# Altium PCB BattBastion_2layer.PcbDoc (part 1 of 2)
Units mm, origin at the board's own origin, x right, y up, seen from the top; angles counter-clockwise.
Board outline 51.31 x 36.45 mm, 2 copper layers (Top Layer, Bottom Layer); 74 components, 42 nets, 277 pads, 438 vias.
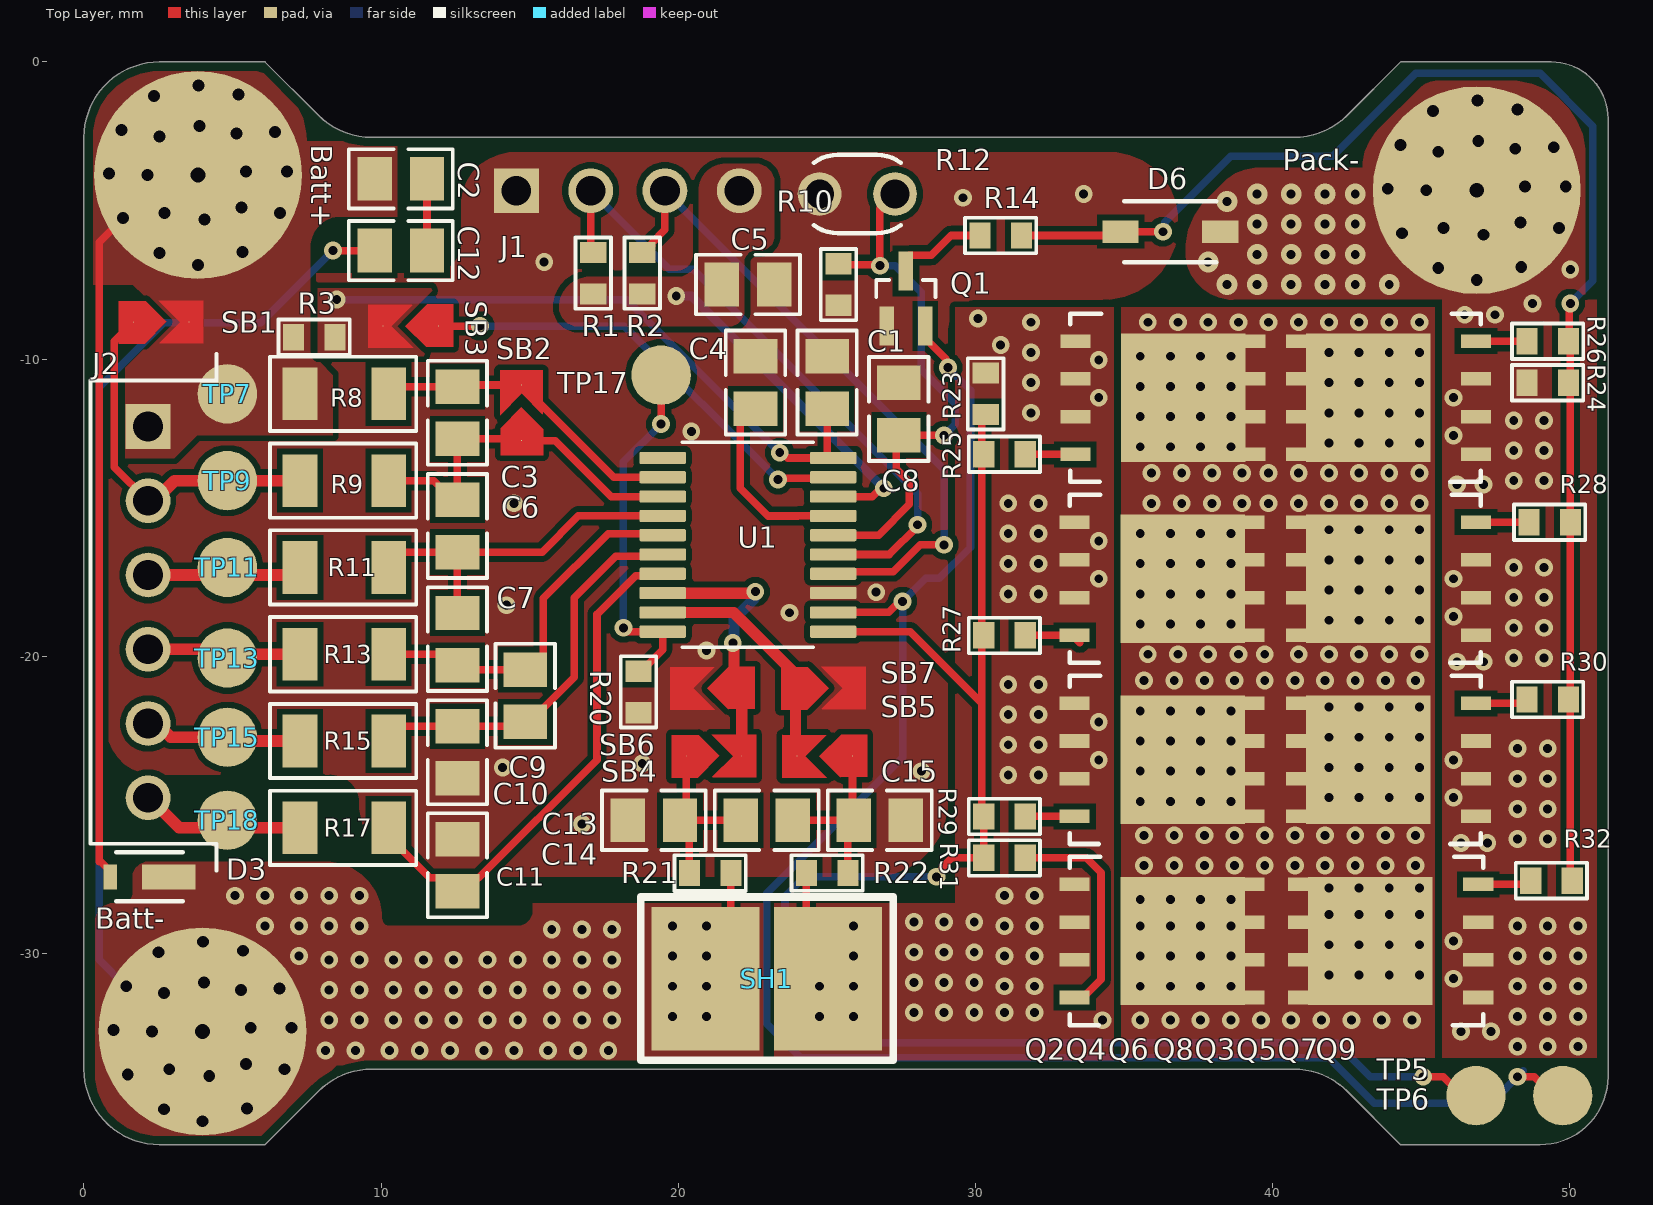
[diagram p0: Top Layer view]
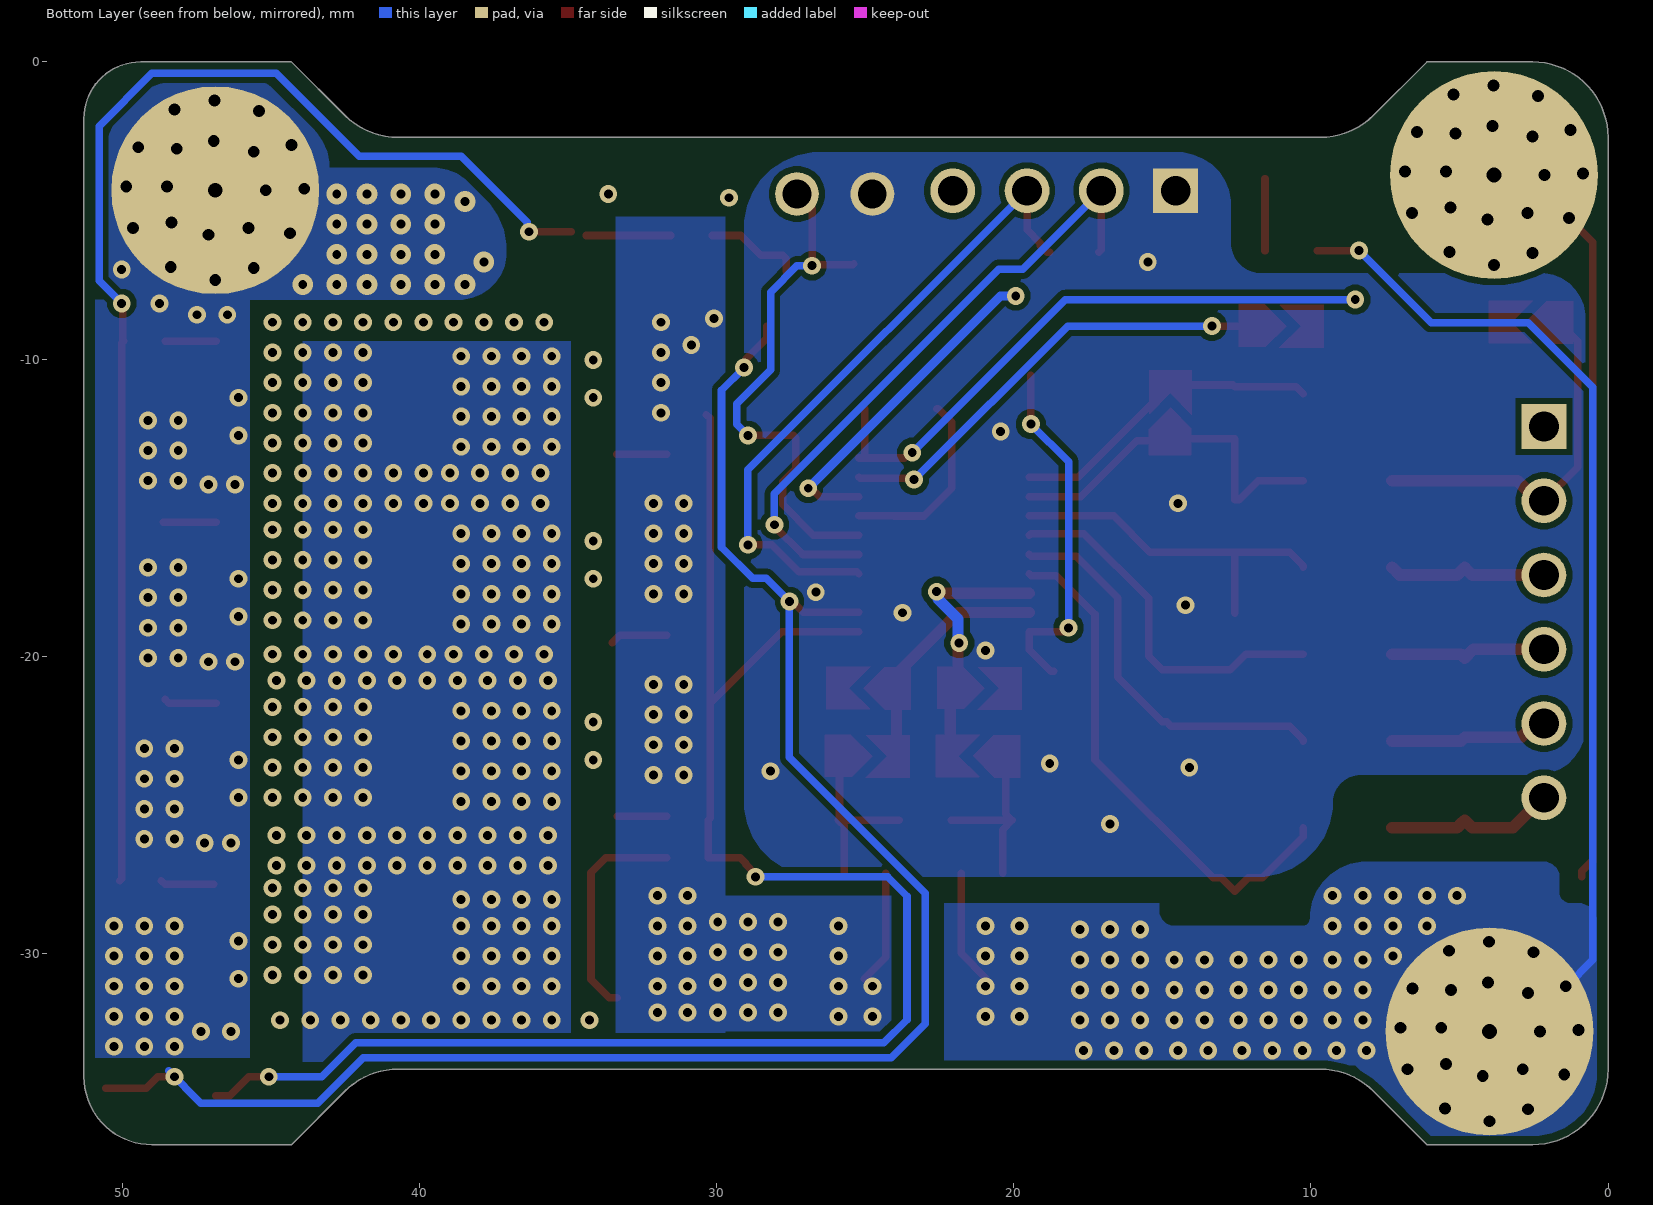
[diagram p1: Bottom Layer view, seen from below]
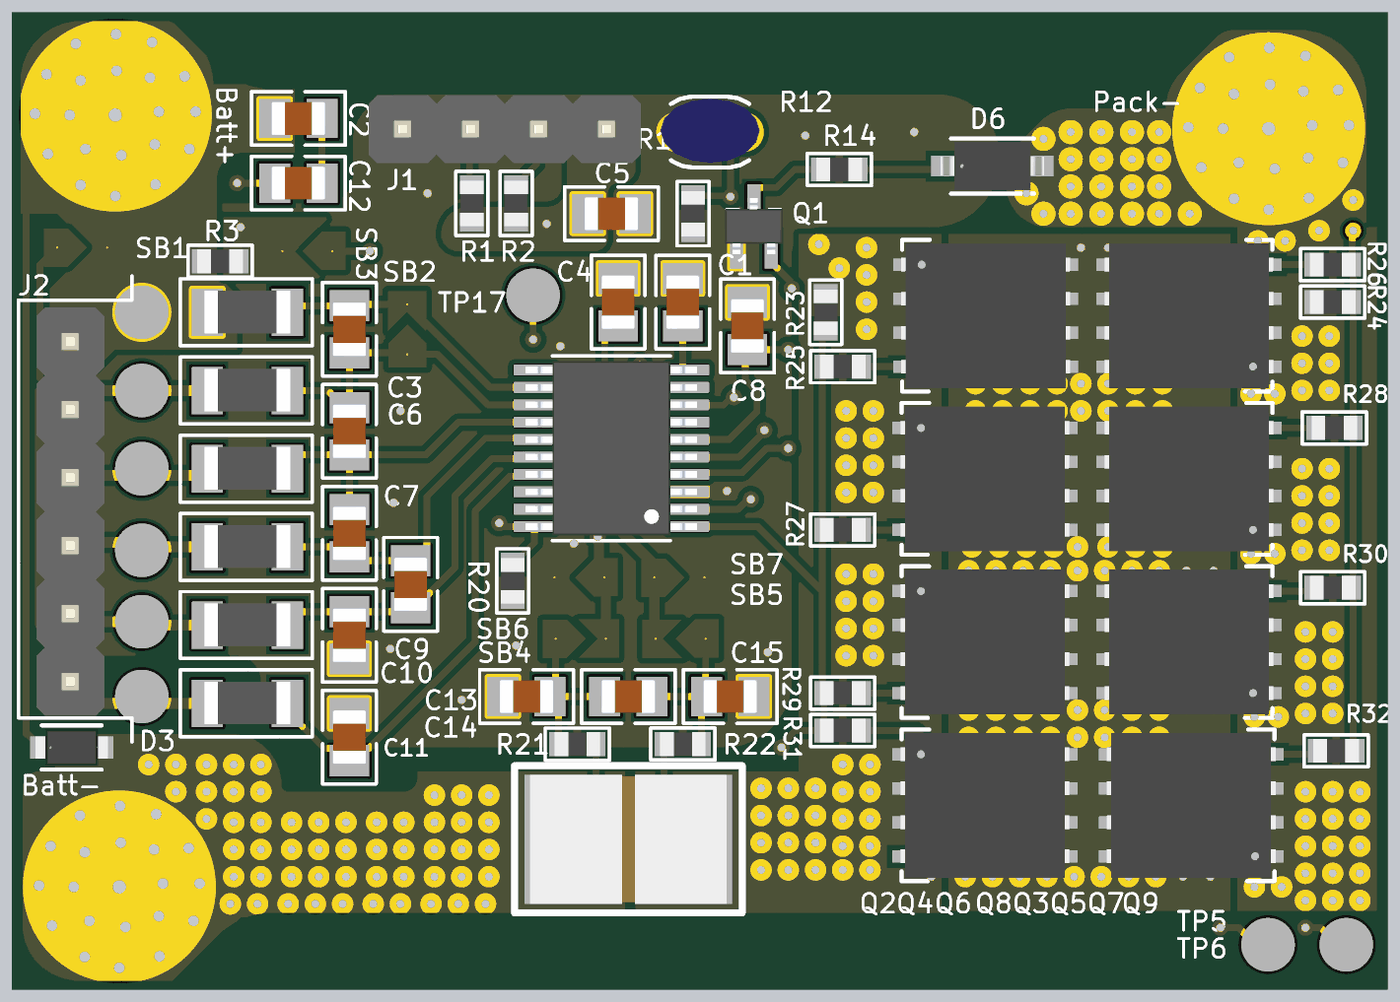
[diagram p2: 3D render of the assembled board from above, using the file's embedded part models]

## Layer stack, top to bottom
Top Solder: solder mask 0.0102, Solder Resist, Dk 3.5
Top Layer: signal copper 0.0356
Dielectric 1: dielectric 0.32, FR-4, Dk 4.8
Bottom Layer: signal copper 0.0356
Bottom Solder: solder mask 0.0102, Solder Resist, Dk 3.5

## Board outline
6.096,-36.449 7.892,-34.653 cw(c9.688,-36.449) 9.688,-33.909 40.731,-33.909 cw(c40.731,-36.449) 42.527,-34.653 44.323,-36.449 49.022,-36.449 ccw(c49.022,-34.163) 51.308,-34.163 51.308,-3.048 51.308,-1.905 ccw(c49.403,-1.905) 49.403,0 44.323,0 42.527,-1.796 cw(c40.731,0) 40.731,-2.54 9.688,-2.54 cw(c9.688,0) 7.892,-1.796 6.096,0 2.54,0 ccw(c2.54,-2.54) 0,-2.54 0,-33.909 ccw(c2.54,-33.909) 2.54,-36.449

## Design rules (kind name [scope] priority, off if disabled: settings)
BoardOutlineClearance [All] p1: gap=0.3 ignorepadtopadclearanceinfootprint=FALSE except(0.4: Arc-SplitBarrior Arc-SplitContinuation Track-SplitBarrior Track-SplitContinuation SMDPad-SplitBarrior SMDPad-SplitContinuation THPad-SplitBarrior THPad-SplitContinuation Via-SplitBarrior Via-SplitContinuation Fill-SplitBarrior Fill-SplitContinuation Poly-SplitBarrior Poly-SplitContinuation Region-SplitBarrior Region-SplitContinuation Text-SplitBarrior Text-SplitContinuation)
Clearance "Clearance Different Nets" [All] p1: gap=0.2 ignorepadtopadclearanceinfootprint=FALSE except(0.089: Arc-Arc Arc-Track Arc-SMDPad Track-Track Track-SMDPad; 0.127: SMDPad-SMDPad SMDPad-Via THPad-Via Via-Via; 0.254: Arc-Via Arc-Text Track-Via Track-Text SMDPad-Text THPad-Text Via-Text Fill-Text Poly-Text Region-Text Text-Text; 0.5: THPad-THPad Via-Hole)
Clearance "Clearance Same Nets" [All] p2: gap=0.2 ignorepadtopadclearanceinfootprint=FALSE except(0.089: Arc-Arc Arc-Track Arc-SMDPad Track-Track Track-SMDPad SMDPad-SMDPad; 0.127: SMDPad-Via THPad-Via; 0.254: Arc-Via Arc-Text Track-Via Track-Text SMDPad-Text THPad-Text Via-Via Via-Text Fill-Text Poly-Text Region-Text Text-Text)
Clearance "Clearance Bottom Layer" [OnLayer('Bottom Layer')] p3: gap=0.203 ignorepadtopadclearanceinfootprint=TRUE except(0.254: Arc-Text Track-Text SMDPad-Text THPad-Text Via-Text Fill-Text Poly-Text Region-Text Text-Text)
Clearance "Clearance Top Layer" [OnLayer('Top Layer')] p4: gap=0.203 ignorepadtopadclearanceinfootprint=TRUE except(0.254: Arc-Text Track-Text SMDPad-Text THPad-Text Via-Text Fill-Text Poly-Text Region-Text Text-Text)
DiffPairsRouting [All] p1: maxlimit=0.254 minlimit=0.254 mostfreqgap=0.254 toplayer_minwidth=0.381 toplayer_maxwidth=0.381 toplayer_prefwidth=0.381 bottomlayer_minwidth=0.381 bottomlayer_maxwidth=0.381 bottomlayer_prefwidth=0.381 maxuncoupledlength=12.7
HoleSize [All] p1: absolutevalues=TRUE maxlimit=6.3 minlimit=0.2 maxpercent=80.000 minpercent=20.000
MinimumAnnularRing [All] p1: minimumring=0.13
MinimumSolderMaskSliver [All] p1: minsoldermaskwidth=0.1
PolygonConnect [All vs IsNamedPolygon('NONET_L-01_P-001') Or IsNamedPolygon('NONET_L-01_P-001') Or IsNamedPolygon('NONET_L-01_P-001') Or IsNamedPolygon('NONET_L-01_P-001') Or IsNamedPolygon('NONET_L-01_P-001') Or IsNamedPolygon('NONET_L-01_P-001') Or IsNamedPolygon('NONET_L-01_P-001') Or IsNamedPolygon('NONET_L-01_P-001') Or IsNamedPolygon('NONET_L-01_P-001') Or IsNamedPolygon('NONET_L-01_P-001') Or IsNamedPolygon('NONET_L-01_P-001') Or IsNamedPolygon('NONET_L-01_P-001') Or IsNamedPolygon('NONET_L-01_P-001')] p1: connectstyle=Direct reliefconductorwidth=0.254 reliefentries=4 polygonreliefangle="90 Angle" airgapwidth=0.254
PolygonConnect PolygonConnect_1 [All] p2: thpad.connectstyle=Relief thpad.reliefconductorwidth=0.508 thpad.reliefentries=4 thpad.polygonreliefangle="90 Angle" thpad.airgapwidth=0.254 smdpad.connectstyle=Relief smdpad.reliefconductorwidth=0.508 smdpad.reliefentries=4 smdpad.polygonreliefangle="90 Angle" smdpad.airgapwidth=0.254 via.connectstyle=Direct via.reliefconductorwidth=0.508 via.reliefentries=4 via.polygonreliefangle="90 Angle" via.airgapwidth=0.254
RoutingCorners [All] p1: cornerstyle=Round minsetback=2.54 maxsetback=2.54
RoutingVias [All] p1: holewidth=0.5 width=1 viastyle="Through Hole" minholewidth=0.2 minwidth=0.35 maxholewidth=1 maxwidth=2
SilkToSilkClearance [All] p1: silktosilkclearance=0.1
SilkToSolderMaskClearance [IsPad] p1: minsilkscreentomaskgap=0.1 clearancetoexposedcopper=TRUE
SolderMaskExpansion [All] p1: expansion=0.102 istentingtop=FALSE
SupplyNets "Schematic Supply Nets_1" [InNet('GND')] p1: voltage=0.000
SupplyNets "Schematic Supply Nets" [InNet('REGOUT')] p2: voltage=0.000
Width [All] p1: maxlimit=2.54 minlimit=0.089 preferedwidth=0.381
24 further rules are at their usual default settings.

## Classes and differential pairs
differential pair SR: +SR_P -SR_N

## Components (designator, comment, footprint, x,y, rotation, side; value= is the part's Value field where it differs from the comment)
Batt+ "Power pad" "POWER THROUGH HOLE PADS" 3.835,-3.81 r0 top
Batt- "Power pad" "POWER THROUGH HOLE PADS" 3.988,-32.639 r0 top
C1 "2.2uF" C0805 25.019,-10.795 r270 top value=2.2µF
C2 "0.1 uF" C0805 10.668,-3.937 r180 top value=100nF
C3 "1 uF, 25V" C0805 12.573,-11.811 r90 top value=1uF
C4 "1 uF, 25V" C0805 22.606,-10.795 r270 top value=1uF
C5 "4.7uF(50V)" C0805 22.352,-7.493 r180 top value=4.7uF
C6 "1 uF, 25V" C0805 12.573,-15.621 r90 top value=1uF
C7 "1 uF, 25V" C0805 12.573,-19.431 r90 top value=1uF
C8 "50V" C0805 27.432,-11.684 r90 top value=4.7nF
C9 "1 uF, 25V" C0805 14.859,-21.336 r90 top value=1uF
C10 "1 uF, 25V" C0805 12.573,-23.241 r90 top value=1uF
C11 "1 uF, 25V" C0805 12.573,-27.042 r270 top value=1uF
C12 "0.1 uF" C0805 10.668,-6.35 r0 top value=100nF
C13 "0.1 uF" C0805 19.186,-25.527 r0 top value=100nF
C14 "0.1 uF" C0805 22.987,-25.527 r0 top value=100nF
C15 "0.1 uF" C0805 26.788,-25.527 r0 top value=100nF
D3 "100V Diode" "DIODE 100V" 2.21,-27.432 r0 top
D6 "16V Zener diode" "ZENER DIODE 16V" 36.576,-5.715 r0 top
J1 "Headers" "4 PIN 2.54MM MALE HEADER" 18.288,-4.318 r0 top
J2 "Battery connector" "6 PIN 2.54MM MALE HEADER" 5.159,-13.272 r270 top value=4.7nF
Pack- "Power pad" "POWER THROUGH HOLE PADS" 46.888,-4.318 r0 top
Q1 "200mW" "P-CH 50V 130MA" 27.671,-7.965 r90 top value=10Ω
Q2 "Power MOSFET" GSFP06120 36.322,-11.303 r0 top
Q3 "Power MOSFET" GSFP06120 43.917,-11.303 r180 top
Q4 "Power MOSFET" GSFP06120 36.297,-17.399 r0 top
Q5 "Power MOSFET" GSFP06120 43.917,-17.399 r180 top
Q6 "Power MOSFET" GSFP06120 36.297,-23.495 r0 top
Q7 "Power MOSFET" GSFP06120 43.917,-23.495 r180 top
Q8 "Power MOSFET" GSFP06120 36.297,-29.591 r0 top
Q9 "Power MOSFET" GSFP06120 43.993,-29.591 r180 top
R1 "10k" BO_CR0603 17.145,-7.112 r270 top value=10kR
R2 "10k" BO_CR0603 18.796,-7.112 r270 top value=10kR
R3 "100" BO_CR0603 7.747,-9.271 r0 top value=100R
R8 "100" R1206 8.763,-11.176 r0 top value=100Ω
R9 "100" R1206 8.763,-14.097 r0 top value=100Ω
R10 "0.25W" BO_CR0603 25.4,-7.493 r270 top value=0Ω
R11 "100" R1206 8.763,-17.018 r0 top value=100Ω
R12 "Thermistor" AT-2_SMI 26.035,-4.445 r180 top value=10kΩ
R13 "100" R1206 8.763,-19.939 r0 top value=100Ω
R14 "1k" BO_CR0603 30.861,-5.842 r0 top value=1kR
R15 "100" R1206 8.763,-22.86 r0 top value=100Ω
R17 "100" R1206 8.763,-25.781 r0 top value=100Ω
R20 "750" BO_CR0603 18.669,-21.209 r270 top value=750kΩ
R21 "100" BO_CR0603 21.082,-27.305 r180 top value=100R
R22 "100" BO_CR0603 25.019,-27.305 r0 top value=100R
R23 "1 MOhms 0603" BO_CR0603 30.353,-11.176 r270 top value=1MR
R24 "1 MOhms 0603" BO_CR0603 49.276,-10.795 r180 top value=1MR
R25 "100" BO_CR0603 30.988,-13.208 r180 top value=100R
R26 "100" BO_CR0603 49.276,-9.398 r180 top value=100R
R27 "100" BO_CR0603 30.988,-19.304 r180 top value=100R
R28 "100" BO_CR0603 49.34,-15.494 r180 top value=100R
R29 "100" BO_CR0603 30.988,-25.4 r180 top value=100R
R30 "100" BO_CR0603 49.276,-21.463 r180 top value=100R
R31 "100" BO_CR0603 30.988,-26.797 r180 top value=100R
R32 "100" BO_CR0603 49.403,-27.559 r180 top value=100R
SB1 "Solder bridge" "SOLDER BRIDGE" 2.598,-8.758 r0 top
SB2 "Solder bridge" "SOLDER BRIDGE" 14.732,-11.811 r90 top
SB3 "Solder bridge" "Solder Bridge" 11.003,-8.89 r180 top
SB4 "Solder bridge" "Solder Bridge" 21.209,-23.368 r0 top
SB5 "Solder bridge" "Solder Bridge" 24.938,-23.368 r180 top
SB6 "Solder bridge" "Solder Bridge" 21.163,-21.082 r180 top
SB7 "Solder bridge" "Solder Bridge" 24.892,-21.082 r0 top
SH1 "10W" "1MOHMS CSR" 22.987,-30.861 r0 top value=1mΩ
TP5 "Pad" "TEST POINT" 46.863,-34.798 r0 top
TP6 "Pad" "TEST POINT" 49.784,-34.798 r0 top
TP7 "Test Point" "TEST POINT" 4.826,-11.176 r0 top
TP9 "Test Point" "TEST POINT" 4.826,-14.097 r0 top
TP11 "Test Point" "TEST POINT" 4.826,-17.018 r0 top
TP13 "Test Point" "TEST POINT" 4.826,-20.066 r0 top
TP15 "Test Point" "TEST POINT" 4.826,-22.733 r0 top
TP17 "Pad" "TEST POINT" 19.431,-10.541 r0 top
TP18 "Test Point" "TEST POINT" 4.826,-25.527 r0 top
U1 "BQ7692000PW" BQ7692 22.352,-16.256 r180 top

## Footprints (in the part's own frame and the unit in brackets; to place one, negate y for a bottom-side part, rotate by r counter-clockwise, add the part's x,y. Pads: shape width x height; smd on the part's side, far side on the other; paste and mask are expansions set on the pad)
"1MOHMS CSR" [mil]
  rect 143x190 smd paste+0 mask+0: 1(-81,0) 2(81,0)
  silkscreen extent -167,-108 167,108, body extent -144,-95 144,95, height 69
"4 PIN 2.54MM MALE HEADER" [mm]
  rect 1.508x1.508 / inner round 1.508 / far side rect 1.508x1.508 hole 1: 1(-3.73,-0.015)
  round 1.508 hole 1: 2(-1.23,-0.015) 3(1.27,-0.015) 4(3.77,-0.015)
  body extent -5,-1.29 5.16,1.25, height 8.38
"6 PIN 2.54MM MALE HEADER" [mm]
  rect 1.508x1.508 / inner round 1.508 / far side rect 1.508x1.508 hole 1: 1(-1,-3)
  round 1.508 hole 1: 2(1.5,-3) 3(4,-3) 4(6.5,-3) 5(9,-3) 6(11.5,-3)
  silkscreen extent -3.45,-4.94 13.95,-0.7, body extent -2.27,-4.27 12.97,-1.73, height 8.38
AT-2_SMI [mil]
  round 58 / inner round 60 / far side round 58 hole 38 paste-99999 mask+0: 1(-50,0) 2(50,0)
  silkscreen extent -57,-52 57,52, body extent -73,-49 73,45, height 339
BO_CR0603 [mil]
  rect 28x35 smd paste+0 mask+0: 1(-27.5,0) 2(27.5,0)
  silkscreen extent -47,-24 47,24, body extent -34,-17 34,17, height 22
BQ7692 [mm]
  rrect25% 1.57x0.41 smd mask+0.03: 1(-2.87,2.925) 2(-2.87,2.275) 3(-2.87,1.625) 4(-2.87,0.975) 5(-2.87,0.325) 6(-2.87,-0.325) 7(-2.87,-0.975) 8(-2.87,-1.625) 9(-2.87,-2.275) 10(-2.87,-2.925) 11(2.87,-2.925) 12(2.87,-2.275) 13(2.87,-1.625) 14(2.87,-0.975) 15(2.87,-0.325) 16(2.87,0.325) 17(2.87,0.975) 18(2.87,1.625) 19(2.87,2.275) 20(2.87,2.925)
  silkscreen extent -2.2,-3.45 2.2,3.45, body extent -3.2,-3.25 3.2,3.25, height 1.2
C0805 [mm]
  rect 1.16x1.47 smd: 1(-0.88,0) 2(0.88,0)
  silkscreen extent -1.75,-1 1.75,1, body extent -1,-0.63 1,0.63, height 0.94
"DIODE 100V" [mil]
  rect 18x33 smd paste+0 mask+0: 1(-52,0)
  rect 71x33 smd paste+0 mask+0: 2(25.5,0)
  silkscreen extent -44,-32 44,32, body extent -53,-27 53,27, height 32
GSFP06120 [mil]
  rect 40x18 smd paste+0 mask+0: 1(-116,-75) 2(116,-75) 2(116,-25) 2(116,25) 2(116,75) 3(-116,-25) 3(-116,25) 3(-116,75)
  rect 165x170 smd mask+0: 2(27,0)
  silkscreen extent -122,-112 -82,112, body extent -124,-106 124,106, height 47
"P-CH 50V 130MA" [mm]
  rect 1.31x0.49 smd: 1(-0.925,0.65) 2(-0.925,-0.65) 3(0.925,0)
  silkscreen extent 0.05,-1 0.63,1, body extent -1.05,-1.07 1.05,1.07, height 1.1
"POWER THROUGH HOLE PADS" [mm]
  round 0.8 hole 0.4: 1(-2.997,0.051) 1(-2.565,1.524) 1(-2.515,-1.448) 1(-1.702,0) 1(-1.473,2.667) 1(-1.295,-2.616) 1(-1.295,1.295) 1(-1.118,-1.27) 1(0,-3.023) 1(0.025,3.023) 1(0.051,1.651) 1(0.229,-1.499) 1(1.295,1.397) 1(1.372,2.718) 1(1.473,-1.092) 1(1.499,-2.591) 1(1.626,0.127) 1(2.591,1.448) 1(2.769,-1.27) 1(2.997,0.127)
  round 7 hole 0.5: 1(0,0)
R1206 [mm]
  rect 1.17x1.77 smd: 1(-1.494,0) 2(1.494,0)
  silkscreen extent -2.5,-1.25 2.42,1.25, body extent -1.6,-0.79 1.6,0.81, height 0.75
"SOLDER BRIDGE" [mil]
  round 1 smd mask+1: 1(-36.81,0) 2(36.81,0)
  Top Layer region: 7.09,0.2 7.09,0.2 -21.65,-28.54 -56.1,-28.54 -56.1,27.56 -20.47,27.76
  Top Layer region: -1.57,-27.95 -1.97,-27.56 25.59,0 -2.95,28.54 56.1,28.54 56.1,-27.98 36.76,-27.95 36.76,-27.95
"Solder Bridge" [mil]
  round 1 smd mask+1: 1(-36.81,0) 2(36.81,0)
  Top Layer region: -1.57,-27.95 -1.97,-27.56 25.59,0 -2.95,28.54 56.1,28.54 56.1,-27.98 36.76,-27.95 36.76,-27.95
  Top Layer region: 7.09,0.2 7.09,0.2 -21.65,-28.54 -56.1,-28.54 -56.1,27.56 -20.47,27.76
"TEST POINT" [mm]
  round 2 smd: 1(0,0)
"ZENER DIODE 16V" [mil]
  rect 48x30 smd paste+0 mask+0: 1(-66,0) 2(66,0)
  silkscreen extent -61,-40 61,40, body extent -76,-36 76,36, height 53

## Part data
Batt+: library part Batt+, "Powerplus High Current Terminal", Manufacturer="Wurth Electronics", Manufacturer Part Number=S93515, Supplier Part Number=2101-S93515-ND, Category=Terminals, Pricing="1=1.59, 10=1.352, 25=1.2668, 99=1.14929, 198=1.09439, 297=1.0635, 594=1.01273, 1089=0.97034, 2574=0.9375 (USD)", RoHS=No, Stock=33869, Supplier=Digikey
Batt-: library part Batt-, "Powerplus High Current Terminal", Manufacturer="Wurth Electronics", Manufacturer Part Number=S93515, Supplier Part Number=2101-S93515-ND, Category=Terminals, Pricing="1=1.59, 10=1.352, 25=1.2668, 99=1.14929, 198=1.09439, 297=1.0635, 594=1.01273, 1089=0.97034, 2574=0.9375 (USD)", RoHS=No, Stock=33869, Supplier=Digikey
C1: library part "2.2uF(25V) 0805", "Ceramic Capacitor, Ceramic, 25V, 10% +Tol, 10% -Tol, X7R, 15% TC, 2.2uF, Surface Mount, 0805", Case Code (Imperial)=0805, Case Code (Metric)=2012, Dielectric=X7R, Dielectric Material=Ceramic, Manufacturer=Murata, Manufacturer Lifecycle Status="IN PRODUCTION", Manufacturer Part Number=GCM21BR71E225KA73L, Max Operating Temperature=125°C, Min Operating Temperature=-55°C, Ratings=AEC-Q200, Tolerance=10%, Voltage=25V, Case/Package=0805, Category="Ceramic Capacitors", ComponentLink1Description=https://datasheet.octopart.com:443/GCM21BR71E225KA73L-Murata-datasheet-39128454.pdf?src-supplier=Newark, ComponentLink1URL=https://datasheet.octopart.com:443/GCM21BR71E225KA73L-Murata-datasheet-39128454.pdf?src-supplier=Newark, ComponentLink2Description=https://datasheet.octopart.com:443/GCM21BR71E225KA73L-Murata-datasheet-62316965.pdf?src-supplier=element14+APAC, ComponentLink2URL=https://datasheet.octopart.com:443/GCM21BR71E225KA73L-Murata-datasheet-62316965.pdf?src-supplier=element14+APAC, ComponentLink3Description=https://datasheet.octopart.com:443/GCM21BR71E225KA73L-Murata-datasheet-141268671.pdf?src-supplier=Geoflip, ComponentLink3URL=https://datasheet.octopart.com:443/GCM21BR71E225KA73L-Murata-datasheet-141268671.pdf?src-supplier=Geoflip, ComponentLink4Description=https://datasheet.octopart.com/GCM21BR71E225KA73L-Murata-datasheet-12524114.pdf, ComponentLink4URL=https://datasheet.octopart.com/GCM21BR71E225KA73L-Murata-datasheet-12524114.pdf, ComponentLink5Description=https://datasheet.octopart.com:443/GCM21BR71E225KA73L-Murata-datasheet-178519998.pdf?src-supplier=Arrow.cn, ComponentLink5URL=https://datasheet.octopart.com:443/GCM21BR71E225KA73L-Murata-datasheet-178519998.pdf?src-supplier=Arrow.cn, ComponentLink6Description=https://datasheet.octopart.com:443/GCM21BR71E225KA73L-Murata-datasheet-140660268.pdf?src-supplier=Ciiva, ComponentLink6URL=https://datasheet.octopart.com:443/GCM21BR71E225KA73L-Murata-datasheet-140660268.pdf?src-supplier=Ciiva, ComponentLink7Description=https://datasheet.octopart.com:443/GCM21BR71E225KA73L-Murata-datasheet-138719632.pdf?src-supplier=Ciiva, ComponentLink7URL=https://datasheet.octopart.com:443/GCM21BR71E225KA73L-Murata-datasheet-138719632.pdf?src-supplier=Ciiva, ComponentLink8Description=https://datasheet.octopart.com:443/GCM21BR71E225KA73L-Murata-datasheet-81857033.pdf?src-supplier=TME, ComponentLink8URL=https://datasheet.octopart.com:443/GCM21BR71E225KA73L-Murata-datasheet-81857033.pdf?src-supplier=TME, ComponentLink9Description=https://datasheet.octopart.com:443/GCM21BR71E225KA73L-Murata-datasheet-44104626.pdf?src-supplier=Future+Electronics, ComponentLink9URL=https://datasheet.octopart.com:443/GCM21BR71E225KA73L-Murata-datasheet-44104626.pdf?src-supplier=Future+Electronics, ComponentLink10Description=http://sigma.octopart.com:80/reach_statement/Murata-company-16.pdf?src-supplier=Compliance+Statements, ComponentLink10URL=http://sigma.octopart.com:80/reach_statement/Murata-company-16.pdf?src-supplier=Compliance+Statements, Depth=1.25mm, Height=1.25mm, Lead Free="Lead Free", Length=2mm, Lifecycle Status=Production, Material=Ceramic, Mounting Technology="Surface Mount", Number of Terminals=2, Packaging="Cut Tape", Pricing="3000=0.0515, 6000=0.05, 9000=0.046 (USD)", Radiation Hardening=No, REACH SVHC=Yes, RoHS=Compliant, Schedule B="8532240020, 8532240020|8532240020, 8532240020|8532240020|8532240020, 8532240020|8532240020|8532240020|8532240020", Stock=2343000, Supplier="Arrow Electronics", Supplier Part Number=GCM21BR71E225KA73L, Termination=SMD/SMT, Voltage Rating=25V, Voltage Rating (DC)=25V, Width=1.25mm
C2 C12 C13 C14 C15: library part "0.1 uF 0805", "Ceramic Capacitor, Multilayer, Ceramic, 50V, 5% +Tol, 5% -Tol, X7R, 15% TC, 0.1uF, Surface Mount, 0805", Capacitor Type=Ceramic, Case/Package=0805, Manufacturer="Kyocera AVX", Manufacturer Part Number=08055C104J4T2A, Max Operating Temperature=125°C, Min Operating Temperature=-55°C, Package Shape=Rectangular, Package Style=SMTMeter, Rated DC Voltage (URdc)=50V, Supplier Part Number=581-08055C104J4T2A, Temperature Characteristics Code=X7R, Tolerance  (fill in as +-)=5%, Category="Ceramic Capacitors", ComponentLink1Description=https://datasheet.ciiva.com:443/pdfs/VipMasterIC/IC/AVXC/AVXC-S-A0009957027/AVXC-S-A0009957027-1.pdf?src-supplier=IHS+Markit, ComponentLink1URL=https://datasheet.ciiva.com:443/pdfs/VipMasterIC/IC/AVXC/AVXC-S-A0009957027/AVXC-S-A0009957027-1.pdf?src-supplier=IHS+Markit, ComponentLink2Description=https://datasheet.ciiva.com/45259/cauto-45259509.pdf?src-supplier=Digikey, ComponentLink2URL=https://datasheet.ciiva.com/45259/cauto-45259509.pdf?src-supplier=Digikey, ComponentLink3Description=https://datasheet.ciiva.com/11504/cauto-11504263.pdf?src-supplier=Avnet, ComponentLink3URL=https://datasheet.ciiva.com/11504/cauto-11504263.pdf?src-supplier=Avnet, ComponentLink4Description=https://datasheet.ciiva.com/5442/cauto-5442795.pdf?src-supplier=Mouser, ComponentLink4URL=https://datasheet.ciiva.com/5442/cauto-5442795.pdf?src-supplier=Mouser, ComponentLink5Description=https://datasheet.ciiva.com/46449/681197-46449293.pdf?src-supplier=Element14, ComponentLink5URL=https://datasheet.ciiva.com/46449/681197-46449293.pdf?src-supplier=Element14, ComponentLink6Description=https://datasheet.ciiva.com/7812/88813-7812350.pdf?src-supplier=Element14, ComponentLink6URL=https://datasheet.ciiva.com/7812/88813-7812350.pdf?src-supplier=Element14, Dielectric Material=Ceramic, Height=1.27mm, JESD-609 Code=e3, Length=2.01mm, Mounting Technology="Surface Mount", Multilayer=Yes, Packaging="Tape and Reel", Pins=2, Pricing="1=0.16, 10=0.088, 50=0.088, 100=0.056, 1000=0.039, 10000=0.026 (USD)", Reach SVHC Compliant=Yes, Reference Standard=AEC-Q200, RoHS=Yes, RoHS Compliant=Yes, Stock=13072, Supplier=Mouser, Terminal Finish=Nickel, Termination=Wraparound, Tolerance (fill in as +-)=5%, Width=1.25mm
C3 C4 C6 C7 C9 C10 C11: library part "1uF 0805", "Ceramic Capacitor, Multilayer, Ceramic, 25V, 10% +Tol, 10% -Tol, X7R, 15% TC, 1uF, Surface Mount, 0805", Capacitor Type=Ceramic, Case/Package=0805, Manufacturer="Kyocera AVX", Manufacturer Part Number=08053C105K4Z4A, Max Operating Temperature=125°C, Min Operating Temperature=-55°C, Package Shape=Rectangular, Package Style=SMTMeter, Rated DC Voltage (URdc)=25V, Supplier Part Number=KAF21KR71E105KL, Temperature Characteristics Code=X7R, Tolerance  (fill in as +-)=10%, Category="Ceramic Capacitors", ComponentLink1Description=https://datasheet.ciiva.com:443/pdfs/VipMasterIC/IC/AVXC/AVXC-S-A0009957027/AVXC-S-A0009957027-1.pdf?src-supplier=IHS+Markit, ComponentLink1URL=https://datasheet.ciiva.com:443/pdfs/VipMasterIC/IC/AVXC/AVXC-S-A0009957027/AVXC-S-A0009957027-1.pdf?src-supplier=IHS+Markit, ComponentLink2Description=http://www.mouser.com/ds/2/40/AutoMLCC-777028.pdf?src-supplier=Mouser, ComponentLink2URL=http://www.mouser.com/ds/2/40/AutoMLCC-777028.pdf?src-supplier=Mouser, ComponentLink3Description=http://datasheets.avx.com/FlexitermMLCC.pdf?src-supplier=Digikey, ComponentLink3URL=http://datasheets.avx.com/FlexitermMLCC.pdf?src-supplier=Digikey, ComponentLink4Description=https://datasheet.octopart.com/08053C105K4Z4A-KYOCERA-AVX-datasheet-50865432.pdf?src-supplier=Future+Electronics, ComponentLink4URL=https://datasheet.octopart.com/08053C105K4Z4A-KYOCERA-AVX-datasheet-50865432.pdf?src-supplier=Future+Electronics, ComponentLink5Description=http://catalogs.avx.com/SurfaceMount.pdf?src-supplier=Digikey, ComponentLink5URL=http://catalogs.avx.com/SurfaceMount.pdf?src-supplier=Digikey, Dielectric Material=Ceramic, Height=1.4mm, JESD-609 Code=e3, Length=2.01mm, Mounting Technology="Surface Mount", Multilayer=Yes, Packaging="Tape and Reel", Pins=2, Pricing="10000=0.0468, 20000=0.046, 40000=0.0452, 60000=0.0444, 80000=0.0436 (USD)", Reach SVHC Compliant=Yes, Reference Standard=AEC-Q200, RoHS=Yes, RoHS Compliant=Yes, Stock=50000, Supplier=Avnet, Terminal Finish=Nickel, Termination=Wraparound, Tolerance (fill in as +-)=10%, Width=1.25mm
C5: library part "4.7uF(50V) 0805", "Ceramic Capacitor, Multilayer, Ceramic, 50V, 10% +Tol, 10% -Tol, X5R, 15% TC, 4.7uF, Surface Mount, 0805", Capacitor Type=Ceramic, Case/Package=0805, Manufacturer=Murata, Manufacturer Part Number=GRM21BR61H475KE51L, Max Operating Temperature=85°C, Min Operating Temperature=-55°C, Package Shape=Rectangular, Package Style=SMTMeter, Rated DC Voltage (URdc)=50V, Supplier Part Number=81-GRM21BR61H475KE1L, Temperature Characteristics Code=X5R, Tolerance  (fill in as +-)=10%, Category="Ceramic Capacitors", ComponentLink1Description=https://datasheet.ciiva.com:443/pdfs/VipMasterIC/IC/MURE/MURE-S-A0004349797/MURE-S-A0004361460-1.pdf?src-supplier=IHS+Markit, ComponentLink1URL=https://datasheet.ciiva.com:443/pdfs/VipMasterIC/IC/MURE/MURE-S-A0004349797/MURE-S-A0004361460-1.pdf?src-supplier=IHS+Markit, ComponentLink2Description=http://www.farnell.com/datasheets/2079186.pdf?src-supplier=Farnell, ComponentLink2URL=http://www.farnell.com/datasheets/2079186.pdf?src-supplier=Farnell, ComponentLink3Description=https://datasheet.octopart.com/GRM21BR61H475KE51L-Murata-datasheet-22122223.pdf?src-supplier=Future+Electronics, ComponentLink3URL=https://datasheet.octopart.com/GRM21BR61H475KE51L-Murata-datasheet-22122223.pdf?src-supplier=Future+Electronics, ComponentLink4Description=http://www.farnell.com/datasheets/2079186.pdf?src-supplier=Element14, ComponentLink4URL=http://www.farnell.com/datasheets/2079186.pdf?src-supplier=Element14, ComponentLink5Description=https://datasheet.octopart.com/GRM21BR61H475KE51L-Murata-datasheet-66077112.pdf?src-supplier=Element14, ComponentLink5URL=https://datasheet.octopart.com/GRM21BR61H475KE51L-Murata-datasheet-66077112.pdf?src-supplier=Element14, ComponentLink6Description=http://search.murata.co.jp/Ceramy/image/img/A01X/G101/ENG/GRM21BR61H475KE51-01.pdf?src-supplier=Digikey, ComponentLink6URL=http://search.murata.co.jp/Ceramy/image/img/A01X/G101/ENG/GRM21BR61H475KE51-01.pdf?src-supplier=Digikey, ComponentLink7Description=https://search.murata.co.jp/Ceramy/image/img/A01X/G101/ENG/GRM21BR61H475KE51-01.pdf?src-supplier=Digikey, ComponentLink7URL=https://search.murata.co.jp/Ceramy/image/img/A01X/G101/ENG/GRM21BR61H475KE51-01.pdf?src-supplier=Digikey, Dielectric Material=Ceramic, Height=1.25mm, JESD-609 Code=e3, Length=2mm, Mounting Technology="Surface Mount", Multilayer=Yes, Packaging="Tape and Reel", Pins=2, Pricing="1=0.19, 10=0.108, 50=0.108, 100=0.068, 1000=0.051, 10000=0.034 (USD)", Reach SVHC Compliant=Yes, RoHS=Yes, RoHS Compliant=Yes, Stock=51409, Supplier=Mouser, Terminal Finish=Nickel, Termination=Wraparound, Tolerance (fill in as +-)=10%, Width=1.25mm
C8: library part "4700pF 0805", "WCAP-CSGP 0805 (2012Metric) Ceramic Capacitor 0.079Lx0.049W 2.00mmx1.25mm X7R ±10% 4700pF", Case Code (Imperial)=0805, Case Code (Metric)=2012, Insulation Resistance=10GΩ, Manufacturer="Wurth Elektronik", Manufacturer Part Number=885012207090, Max Operating Temperature=125°C, Min Operating Temperature=-55°C, Supplier Part Number=732-8072-1-ND, Tolerance=10%, Case/Package=0805, Category="Ceramic Capacitors", ComponentLink1Description=https://datasheet.octopart.com:443/885012207090-W%C3%BCrth-Elektronik-datasheet-137006526.pdf?src-supplier=Upverter, ComponentLink1URL=https://datasheet.octopart.com:443/885012207090-W%C3%BCrth-Elektronik-datasheet-137006526.pdf?src-supplier=Upverter, ComponentLink2Description=https://datasheet.octopart.com:443/885012207090-Wurth-Elektronik-datasheet-159617621.pdf?src-supplier=Newark, ComponentLink2URL=https://datasheet.octopart.com:443/885012207090-Wurth-Elektronik-datasheet-159617621.pdf?src-supplier=Newark, Height=800µm, Length=2mm, Material=Ceramic, Mounting Technology="Surface Mount", Pricing="1=0.1, 10=0.055, 50=0.0378, 100=0.0327, 500=0.02396, 1000=0.0213 (USD)", RoHS=Compliant, Stock=13537, Supplier=DigiKey, Thickness=889µm, Voltage Rating=50V, Width=1.25mm
D3: "Diode Fast Recovery Diode 100V 0.5A 2-Pin TUMD T/R", Average Rectified Current=500mA, Case/Package=SMD/SMT, Forward Voltage=820mV, Manufacturer=Rohm, Manufacturer Part Number=RF05VAM1STR, Max Operating Temperature=150°C, Max Reverse Current=10uA, Max Reverse Voltage (DC)=100V, Max Surge Current=6A, Min Operating Temperature=-55°C, Package Quantity=3000, Supplier Part Number=755-RF05VAM1STR, Category="Rectifier Diodes", ComponentLink1Description=http://www.mouser.com/ds/2/348/rf05vam1s-520110.pdf?src-supplier=Mouser, ComponentLink1URL=http://www.mouser.com/ds/2/348/rf05vam1s-520110.pdf?src-supplier=Mouser, ComponentLink2Description=http://rohmfs.rohm.com/en/techdata_basic/diode/taping/Taping_TUMD2M_TR-e.pdf?src-supplier=Digikey, ComponentLink2URL=http://rohmfs.rohm.com/en/techdata_basic/diode/taping/Taping_TUMD2M_TR-e.pdf?src-supplier=Digikey, ComponentLink3Description=http://rohmfs.rohm.com/en/products/databook/datasheet/discrete/diode/fast_recovery/rf05vam1s.pdf?src-supplier=Digikey, ComponentLink3URL=http://rohmfs.rohm.com/en/products/databook/datasheet/discrete/diode/fast_recovery/rf05vam1s.pdf?src-supplier=Digikey, ComponentLink4Description=http://rohmfs.rohm.com/en/products/databook/datasheet/discrete/diode/fast_recovery/rf05vam1s.pdf?src-supplier=Avnet, ComponentLink4URL=http://rohmfs.rohm.com/en/products/databook/datasheet/discrete/diode/fast_recovery/rf05vam1s.pdf?src-supplier=Avnet, Forward Current=500mA, Mounting Technology="Surface Mount", Packaging="Tape and Reel", Pricing="1=0.24, 10=0.128, 50=0.128, 100=0.098, 1000=0.081, 10000=0.048 (USD)", Recovery Time=12ns, Reverse Recovery Time=25ns, RoHS=Yes, RoHS Compliant=Yes, Series=-, Stock=50105, Supplier=Mouser
D6: "Diode Zener Single 16V 5% 500mW Automotive 2-Pin SOD-123 T/R", Manufacturer="ON Semiconductor", Manufacturer Part Number=SZMMSZ5246BT1G, Category="Zener Diodes", ComponentLink1Description=https://datasheet.ciiva.com/10638/mmsz5221bt1-d-10638284.pdf?src-supplier=Avnet, ComponentLink1URL=https://datasheet.ciiva.com/10638/mmsz5221bt1-d-10638284.pdf?src-supplier=Avnet, ComponentLink2Description=https://datasheet.ciiva.com/900/mmsz5221bt1-d-900242.pdf?src-supplier=Digikey, ComponentLink2URL=https://datasheet.ciiva.com/900/mmsz5221bt1-d-900242.pdf?src-supplier=Digikey, Pricing="1=0.126, 10=0.0807, 100=0.0626, 500=0.0611, 1000=0.0597, 3000=0.0399, 6000=0.0386 (USD)", RoHS=Yes, Stock=21000, Supplier="Arrow Electronics", Supplier Part Number=SZMMSZ5246BT1G
J1: library part "I2C port"
J2: "WCAP-CSGP 0805 (2012Metric) Ceramic Capacitor 0.079Lx0.049W 2.00mmx1.25mm X7R ±10% 4700pF", Case Code (Imperial)=0805, Case Code (Metric)=2012, Insulation Resistance=10GΩ, Manufacturer="Wurth Elektronik", Manufacturer Part Number=885012207090, Max Operating Temperature=125°C, Min Operating Temperature=-55°C, Supplier Part Number=732-8072-1-ND, Tolerance=10%, Voltage Rating=50V, Case/Package=0805, Category="Ceramic Capacitors", ComponentLink1Description=https://datasheet.octopart.com:443/885012207090-W%C3%BCrth-Elektronik-datasheet-137006526.pdf?src-supplier=Upverter, ComponentLink1URL=https://datasheet.octopart.com:443/885012207090-W%C3%BCrth-Elektronik-datasheet-137006526.pdf?src-supplier=Upverter, ComponentLink2Description=https://datasheet.octopart.com:443/885012207090-Wurth-Elektronik-datasheet-159617621.pdf?src-supplier=Newark, ComponentLink2URL=https://datasheet.octopart.com:443/885012207090-Wurth-Elektronik-datasheet-159617621.pdf?src-supplier=Newark, Height=800µm, Length=2mm, Material=Ceramic, Mounting Technology="Surface Mount", Pricing="1=0.1, 10=0.055, 50=0.0378, 100=0.0327, 500=0.02396, 1000=0.0213 (USD)", RoHS=Compliant, Stock=13537, Supplier=DigiKey, Thickness=889µm, Width=1.25mm
Pack-: library part Pack-, "Powerplus High Current Terminal", Manufacturer="Wurth Electronics", Manufacturer Part Number=S93515, Supplier Part Number=2101-S93515-ND, Category=Terminals, Pricing="1=1.59, 10=1.352, 25=1.2668, 99=1.14929, 198=1.09439, 297=1.0635, 594=1.01273, 1089=0.97034, 2574=0.9375 (USD)", RoHS=No, Stock=33869, Supplier=Digikey
Q1: library part "P-CH 50V 130MA", "P-Channel 50 V 10 Ohm Enhancement Mode Transistor SOT-323", Case/Package=SOT-323, Continuous Drain Current (ID)=130mA, Current Rating=-130mA, Drain to Source Resistance=10Ω, Drain to Source Voltage (Vdss)=-50V, Gate to Source Voltage (Vgs)=20V, Input Capacitance=45pF, Manufacturer="Diodes Inc.", Manufacturer Part Number=BSS84W-7-F, Max Operating Temperature=150°C, Min Breakdown Voltage=50V, Min Operating Temperature=-55°C, Supplier Part Number=2191460, Threshold Voltage=-1.6V, Category=MOSFETs, China RoHS=Compliant, ComponentLink1Description=https://datasheet.octopart.com:443/BSS84W-7-F-Diodes-Inc.-datasheet-180551845.pdf?src-supplier=Newark, ComponentLink1URL=https://datasheet.octopart.com:443/BSS84W-7-F-Diodes-Inc.-datasheet-180551845.pdf?src-supplier=Newark, ComponentLink2Description=https://datasheet.octopart.com:443/BSS84W-7-F-Diodes-Inc.-datasheet-12525918.pdf?src-supplier=Newark, ComponentLink2URL=https://datasheet.octopart.com:443/BSS84W-7-F-Diodes-Inc.-datasheet-12525918.pdf?src-supplier=Newark, ComponentLink3Description=https://datasheet.octopart.com:443/BSS84W-7-F-Diodes-Inc.-datasheet-8398566.pdf?src-supplier=Newark, ComponentLink3URL=https://datasheet.octopart.com:443/BSS84W-7-F-Diodes-Inc.-datasheet-8398566.pdf?src-supplier=Newark, ComponentLink4Description=https://datasheet.octopart.com:443/BSS84W-7-F-Diodes-Inc.-datasheet-41567332.pdf?src-supplier=Newark, ComponentLink4URL=https://datasheet.octopart.com:443/BSS84W-7-F-Diodes-Inc.-datasheet-41567332.pdf?src-supplier=Newark, ComponentLink5Description=https://datasheet.octopart.com:443/BSS84W-7-F-Diodes-Inc.-datasheet-116035940.pdf?src-supplier=Diodes+Inc+SCT, ComponentLink5URL=https://datasheet.octopart.com:443/BSS84W-7-F-Diodes-Inc.-datasheet-116035940.pdf?src-supplier=Diodes+Inc+SCT, ComponentLink6Description=https://sigma.octopart.com:443/138896157/technical_drawing/Diodes-Inc.-BSS84W-7-F.pdf?src-supplier=Diodes+Inc+SCT, ComponentLink6URL=https://sigma.octopart.com:443/138896157/technical_drawing/Diodes-Inc.-BSS84W-7-F.pdf?src-supplier=Diodes+Inc+SCT, ComponentLink7Description=https://datasheet.octopart.com:443/BSS84W-7-F-Diodes-Inc.-datasheet-128476779.pdf?src-supplier=TME, ComponentLink7URL=https://datasheet.octopart.com:443/BSS84W-7-F-Diodes-Inc.-datasheet-128476779.pdf?src-supplier=TME, ComponentLink8Description=https://datasheet.octopart.com:443/BSS84W-7-F-Diodes-Inc.-datasheet-14061317.pdf?src-supplier=iiiC, ComponentLink8URL=https://datasheet.octopart.com:443/BSS84W-7-F-Diodes-Inc.-datasheet-14061317.pdf?src-supplier=iiiC, ComponentLink9Description=https://datasheet.octopart.com:443/BSS84W-7-F-Diodes-Inc.-datasheet-41929731.pdf?src-supplier=RS+(Formerly+Allied+Electronics), ComponentLink9URL=https://datasheet.octopart.com:443/BSS84W-7-F-Diodes-Inc.-datasheet-41929731.pdf?src-supplier=RS+(Formerly+Allied+Electronics), ComponentLink10Description=https://datasheet.octopart.com:443/BSS84W-7-F-Diodes-Inc.-datasheet-8318221.pdf?src-supplier=Jameco, ComponentLink10URL=https://datasheet.octopart.com:443/BSS84W-7-F-Diodes-Inc.-datasheet-8318221.pdf?src-supplier=Jameco, ComponentLink11Description=https://datasheet.octopart.com:443/BSS84W-7-F-Diodes-Inc.-datasheet-71356.pdf?src-supplier=Mouser, ComponentLink11URL=https://datasheet.octopart.com:443/BSS84W-7-F-Diodes-Inc.-datasheet-71356.pdf?src-supplier=Mouser, ComponentLink12Description=http://sigma.octopart.com:80/15540767/rohs_statement/Diodes-Inc.-BSS84W-7-F.pdf?src-supplier=Compliance+Statements, ComponentLink12URL=http://sigma.octopart.com:80/15540767/rohs_statement/Diodes-Inc.-BSS84W-7-F.pdf?src-supplier=Compliance+Statements, Contact Plating=Tin, Element Configuration=Single, Height=1mm, Lead Free="Lead Free", Length=2.2mm, Lifecycle Status=Production, Max Power Dissipation=200mW, Mounting Technology="Surface Mount", Nominal Vgs=-1.6V, Number of Channels=1, Number of Elements=1, Number of Terminals=3, Pins=3, Power Dissipation=200mW, Pricing="3000=0.0295, 9000=0.0288, 15000=0.0285, 60000=0.0276, 90000=0.027 (USD)", Radiation Hardening=No, Rds On Max=10Ω, REACH SVHC=Yes, RoHS=Compliant, Schedule B="8541210080, 8541210080|8541210080, 8541210080|8541210080|8541210080, 8541210080|8541210080|8541210080|8541210080", Stock=1830000, Supplier="Future Electronics", Turn-Off Delay Time=18ns, Turn-On Delay Time=10ns, Voltage Rating (DC)=-50V, Weight=6.010099mg, Width=1.35mm
Q2 Q3 Q4 Q5 Q6 Q7 Q8 Q9: "Mosfet, N-ch, Single, 120A, 65V,", Manufacturer=Good-Ark, Manufacturer Part Number=GSFP06120, Supplier Part Number=4786-GSFP06120CT-ND, Category=MOSFETs, Pricing="1=0.93, 10=0.669, 25=0.6028, 100=0.5305, 250=0.49588, 500=0.47506, 1000=0.45792 (USD)", Stock=2771, Supplier=DigiKey
R1 R2: library part "10 kOhms 0603", "Fixed Resistor, Metal Glaze/thick Film, 0.1W, 10000ohm, 75V, 1% +/-Tol, 100ppm/Cel, Surface Mount, 0603", Case/Package=0603, Manufacturer=Bourns, Manufacturer Part Number=CR0603-FX-1002ELF, Max Operating Temperature=155°C, Min Operating Temperature=-55°C, Package Height=0.45mm, Package Length=1.6mm, Package Shape=Rectangular, Package Width=0.8mm, Power=100mW, Rated Temperature=70°C, Resistor Type="FIXED RESISTOR", Temperature Coefficient (ppm/Cel)=100, Tolerance=1%, Working Voltage=50V, Category="Chip SMD Resistors", ComponentLink1Description=https://datasheet.ciiva.com:443/pdfs/VipMasterIC/IC/BOUR/BOUR-S-A0009069624/BOUR-S-A0009069624-1.pdf?src-supplier=IHS+Markit, ComponentLink1URL=https://datasheet.ciiva.com:443/pdfs/VipMasterIC/IC/BOUR/BOUR-S-A0009069624/BOUR-S-A0009069624-1.pdf?src-supplier=IHS+Markit, ComponentLink2Description=https://datasheet.ciiva.com/11808/0900766b80fcdb72-11808032.pdf?src-supplier=Rs, ComponentLink2URL=https://datasheet.ciiva.com/11808/0900766b80fcdb72-11808032.pdf?src-supplier=Rs, ComponentLink3Description=https://datasheet.ciiva.com/27049/774903-27049975.pdf?src-supplier=Jameco, ComponentLink3URL=https://datasheet.ciiva.com/27049/774903-27049975.pdf?src-supplier=Jameco, ComponentLink4Description=https://datasheet.ciiva.com/22644/1849498-22644171.pdf?src-supplier=Element14, ComponentLink4URL=https://datasheet.ciiva.com/22644/1849498-22644171.pdf?src-supplier=Element14, ComponentLink5Description=https://datasheet.ciiva.com/22693/1902866-22693206.pdf?src-supplier=Element14, ComponentLink5URL=https://datasheet.ciiva.com/22693/1902866-22693206.pdf?src-supplier=Element14, ComponentLink6Description=https://datasheet.ciiva.com/5548/chpreztr-5548911.pdf?src-supplier=Mouser, ComponentLink6URL=https://datasheet.ciiva.com/5548/chpreztr-5548911.pdf?src-supplier=Mouser, ComponentLink7Description=https://datasheet.ciiva.com/16757/70154685-16757483.pdf?src-supplier=Allied+Electronics, ComponentLink7URL=https://datasheet.ciiva.com/16757/70154685-16757483.pdf?src-supplier=Allied+Electronics, ComponentLink8Description=https://datasheet.ciiva.com/3255/chpreztr-3255918.pdf?src-supplier=Avnet, ComponentLink8URL=https://datasheet.ciiva.com/3255/chpreztr-3255918.pdf?src-supplier=Avnet, ComponentLink9Description=https://datasheet.ciiva.com/7001/1902866-7001623.pdf?src-supplier=Newark, ComponentLink9URL=https://datasheet.ciiva.com/7001/1902866-7001623.pdf?src-supplier=Newark, Construction=Chip, JESD-609 Code=e3, Mounting Technology="Surface Mount", Packaging="Tape and Reel", Pins=2, Pricing="5000=0.00217, 10000=0.00213, 20000=0.0021, 30000=0.00207, 40000=0.00203 (USD)", Reach SVHC Compliant=Yes, RoHS=Yes, RoHS Compliant=Yes, Stock=95000, Supplier=Avnet, Supplier Part Number=CR0603-FX-1002ELF, Technology="RUTHENIUM OXIDE", Terminal Finish=Nickel, Termination=Wraparound
R3 R21 R22 R25 R26 R27 R28 R29 R30 R31 R32: library part "100 Ohms 0603", "Fixed Resistor, Metal Glaze/thick Film, 0.1W, 100ohm, 75V, 1% +/-Tol, 100ppm/Cel, Surface Mount, 0603", Case/Package=0603, Manufacturer=Bourns, Manufacturer Part Number=CR0603-FX-1000ELF, Max Operating Temperature=155°C, Min Operating Temperature=-55°C, Package Height=0.45mm, Package Length=1.6mm, Package Shape=Rectangular, Package Width=0.8mm, Power=100mW, Rated Temperature=70°C, Resistor Type="FIXED RESISTOR", Tolerance=1%, Working Voltage=50V, Category="Chip SMD Resistors", ComponentLink1Description=https://datasheet.ciiva.com:443/pdfs/VipMasterIC/IC/BOUR/BOUR-S-A0009069624/BOUR-S-A0009069624-1.pdf?src-supplier=IHS+Markit, ComponentLink1URL=https://datasheet.ciiva.com:443/pdfs/VipMasterIC/IC/BOUR/BOUR-S-A0009069624/BOUR-S-A0009069624-1.pdf?src-supplier=IHS+Markit, ComponentLink2Description=https://datasheet.ciiva.com/11808/0900766b80fcdb72-11808031.pdf?src-supplier=Rs, ComponentLink2URL=https://datasheet.ciiva.com/11808/0900766b80fcdb72-11808031.pdf?src-supplier=Rs, ComponentLink3Description=https://datasheet.ciiva.com/41449/001055482-da-01-en-smd-wid-cr0603-fx-1000elf-100-ohm-1-10w-41449966.pdf?src-supplier=Conrad, ComponentLink3URL=https://datasheet.ciiva.com/41449/001055482-da-01-en-smd-wid-cr0603-fx-1000elf-100-ohm-1-10w-41449966.pdf?src-supplier=Conrad, ComponentLink4Description=https://datasheet.ciiva.com/7001/1902866-7001621.pdf?src-supplier=Newark, ComponentLink4URL=https://datasheet.ciiva.com/7001/1902866-7001621.pdf?src-supplier=Newark, ComponentLink5Description=https://datasheet.ciiva.com/31841/159chpreztr-31841547.pdf?src-supplier=Onlinecomponents.com, ComponentLink5URL=https://datasheet.ciiva.com/31841/159chpreztr-31841547.pdf?src-supplier=Onlinecomponents.com, ComponentLink6Description=https://datasheet.ciiva.com/7986/691949-7986155.pdf?src-supplier=Element14, ComponentLink6URL=https://datasheet.ciiva.com/7986/691949-7986155.pdf?src-supplier=Element14, ComponentLink7Description=https://datasheet.ciiva.com/6564/chpreztr-6564376.pdf?src-supplier=Digikey, ComponentLink7URL=https://datasheet.ciiva.com/6564/chpreztr-6564376.pdf?src-supplier=Digikey, ComponentLink8Description=https://datasheet.ciiva.com/6564/chpreztr-6564377.pdf?src-supplier=Digikey, ComponentLink8URL=https://datasheet.ciiva.com/6564/chpreztr-6564377.pdf?src-supplier=Digikey, ComponentLink9Description=https://datasheet.ciiva.com/6564/chpreztr-6564375.pdf?src-supplier=Digikey, ComponentLink9URL=https://datasheet.ciiva.com/6564/chpreztr-6564375.pdf?src-supplier=Digikey, Construction=Chip, JESD-609 Code=e3, Mounting Technology="Surface Mount", Packaging="Tape and Reel", Pins=2, Pricing="5000=0.00217, 10000=0.00213, 20000=0.0021, 30000=0.00207, 40000=0.00203 (USD)", Reach SVHC Compliant=Yes, RoHS=Yes, RoHS Compliant=Yes, Stock=30000, Supplier=Avnet, Supplier Part Number=CR0603-FX-1000ELF, Technology="RUTHENIUM OXIDE", Temperature Coefficient (ppm/Cel)=100, Terminal Finish=Nickel, Termination=Wraparound
R8 R9 R11 R13 R15 R17: library part "100 Ohms 1206", "Res Thick Film 1206 100 Ohm 1% 0.5W(1/2W) ±100ppm/C Pad SMD T/R", Case/Package=1206, Manufacturer=Bourns, Manufacturer Part Number=CRM1206-FX-1000ELF, Max Operating Temperature=155°C, Max Power Dissipation=500mW, Min Operating Temperature=-55°C, Supplier Part Number=34AK1227, Temperature Coefficient=100ppm/°C, Tolerance=1%, Working Voltage=200V, Category="Chip SMD Resistors", China RoHS=Non-Compliant, ComponentLink1Description=https://datasheet.octopart.com:443/CRM1206-FX-1000ELF-Bourns-datasheet-182141858.pdf?src-supplier=Master+Electronics, ComponentLink1URL=https://datasheet.octopart.com:443/CRM1206-FX-1000ELF-Bourns-datasheet-182141858.pdf?src-supplier=Master+Electronics, ComponentLink2Description=https://datasheet.octopart.com:443/CRM1206-FX-1000ELF-Bourns-datasheet-68302004.pdf?src-supplier=Master+Electronics, ComponentLink2URL=https://datasheet.octopart.com:443/CRM1206-FX-1000ELF-Bourns-datasheet-68302004.pdf?src-supplier=Master+Electronics, ComponentLink3Description=https://datasheet.octopart.com:443/CRM1206-FX-1000ELF-Bourns-datasheet-164353756.pdf?src-supplier=element14+APAC, ComponentLink3URL=https://datasheet.octopart.com:443/CRM1206-FX-1000ELF-Bourns-datasheet-164353756.pdf?src-supplier=element14+APAC, ComponentLink4Description=https://datasheet.octopart.com:443/CRM1206-FX-1000ELF-Bourns-datasheet-154729671.pdf?src-supplier=Electro+Sonic, ComponentLink4URL=https://datasheet.octopart.com:443/CRM1206-FX-1000ELF-Bourns-datasheet-154729671.pdf?src-supplier=Electro+Sonic, ComponentLink5Description=https://datasheet.octopart.com:443/CRM1206-FX-1000ELF-Bourns-datasheet-137068308.pdf?src-supplier=X-ON, ComponentLink5URL=https://datasheet.octopart.com:443/CRM1206-FX-1000ELF-Bourns-datasheet-137068308.pdf?src-supplier=X-ON, ComponentLink6Description=https://datasheet.octopart.com:443/CRM1206-FX-1000ELF-Bourns-datasheet-97424573.pdf?src-supplier=Burklin+Elektronik, ComponentLink6URL=https://datasheet.octopart.com:443/CRM1206-FX-1000ELF-Bourns-datasheet-97424573.pdf?src-supplier=Burklin+Elektronik, ComponentLink7Description=http://sigma.octopart.com:80/conflict_mineral_statement/Bourns-company-36.pdf?src-supplier=Compliance+Statements, ComponentLink7URL=http://sigma.octopart.com:80/conflict_mineral_statement/Bourns-company-36.pdf?src-supplier=Compliance+Statements, Composition="Thick Film", Height=550µm, Length=3.0988mm, Lifecycle Status=Production, Mounting Technology="Surface Mount", Number of Terminals=2, Number of Terminations=2, Packaging="Tape & Reel (TR)", Power Dissipation=500mW, Pricing="1=0.198, 25=0.066, 50=0.053, 100=0.041 (USD)", REACH SVHC=Yes, RoHS=Compliant, Schedule B="8533210045, 8533210045|8533210045|8533210045|8533210045|8533210045", Stock=13169, Supplier=Avnet, Width=1.6mm
R10: library part "0 Ohms 0603", "Res Metal Plate 0603 0 Ohm Pad SMD T/R Automotive", Case Code (Imperial)=0603, Case Code (Metric)=1608, Manufacturer="Stackpole Electronics", Manufacturer Part Number=HCJ0603ZT0R00, Max Operating Temperature=155°C, Min Operating Temperature=-55°C, Power Dissipation=250mW, Case/Package=0603, Category="Chip SMD Resistors", ComponentLink1Description=https://datasheet.octopart.com:443/HCJ0603ZT0R00-Stackpole-Electronics-datasheet-170576570.pdf?src-supplier=IHS, ComponentLink1URL=https://datasheet.octopart.com:443/HCJ0603ZT0R00-Stackpole-Electronics-datasheet-170576570.pdf?src-supplier=IHS, ComponentLink2Description=https://datasheet.octopart.com:443/HCJ0603ZT0R00-Stackpole-Electronics-datasheet-56871323.pdf?src-supplier=Upverter, ComponentLink2URL=https://datasheet.octopart.com:443/HCJ0603ZT0R00-Stackpole-Electronics-datasheet-56871323.pdf?src-supplier=Upverter, ComponentLink3Description=https://datasheet.octopart.com:443/HCJ0603ZT0R00-Stackpole-Electronics-datasheet-189104157.pdf?src-supplier=Master+Electronics, ComponentLink3URL=https://datasheet.octopart.com:443/HCJ0603ZT0R00-Stackpole-Electronics-datasheet-189104157.pdf?src-supplier=Master+Electronics, ComponentLink4Description=https://datasheet.octopart.com:443/HCJ0603ZT0R00-Stackpole-Electronics-datasheet-141193803.pdf?src-supplier=Stackpole+Electronics, ComponentLink4URL=https://datasheet.octopart.com:443/HCJ0603ZT0R00-Stackpole-Electronics-datasheet-141193803.pdf?src-supplier=Stackpole+Electronics, ComponentLink5Description=https://datasheet.octopart.com:443/HCJ0603ZT0R00-Stackpole-Electronics-datasheet-45185688.pdf?src-supplier=Stackpole+Electronics, ComponentLink5URL=https://datasheet.octopart.com:443/HCJ0603ZT0R00-Stackpole-Electronics-datasheet-45185688.pdf?src-supplier=Stackpole+Electronics, ComponentLink6Description=https://datasheet.octopart.com:443/HCJ0603ZT0R00-Stackpole-Electronics-datasheet-156956881.pdf?src-supplier=Electro+Sonic, ComponentLink6URL=https://datasheet.octopart.com:443/HCJ0603ZT0R00-Stackpole-Electronics-datasheet-156956881.pdf?src-supplier=Electro+Sonic, ComponentLink7Description=http://sigma.octopart.com:80/141158211/reach_statement/Stackpole-Electronics-HCJ0603ZT0R00.pdf?src-supplier=Compliance+Statements, ComponentLink7URL=http://sigma.octopart.com:80/141158211/reach_statement/Stackpole-Electronics-HCJ0603ZT0R00.pdf?src-supplier=Compliance+Statements, ComponentLink8Description=http://sigma.octopart.com:80/141158212/rohs_statement/Stackpole-Electronics-HCJ0603ZT0R00.pdf?src-supplier=Compliance+Statements, ComponentLink8URL=http://sigma.octopart.com:80/141158212/rohs_statement/Stackpole-Electronics-HCJ0603ZT0R00.pdf?src-supplier=Compliance+Statements, Height=500µm, Length=1.5494mm, Lifecycle Status=Production, Mounting Technology="Surface Mount", Number of Terminals=2, Number of Terminations=2, Packaging="Tape & Reel (TR)", Power Rating=250mW, Pricing="5000=0.07857, 10000=0.07432, 20000=0.07237, 40000=0.07051, 80000=0.06875 (USD)", Radiation Hardening=No, REACH SVHC=Yes, RoHS=Compliant, Schedule B="8533210045, 8533210045|8533210045, 8533210045|8533210045|8533210045, 8533210045|8533210045|8533210045|8533210045", Stock=155000, Supplier=Avnet, Supplier Part Number=HCJ0603ZT0R00, Termination=Wraparound, Width=800µm
R12: library part "10kOhms 103AT-2 NTC Thermistor", "NTC Thermistor, 10000ohm, Through Hole Mount", Case/Package=Radial, Manufacturer=Semitec, Manufacturer Part Number=103AT-2, Max Operating Temperature=110°C, Min Operating Temperature=-50°C, Power Dissipation=10mW, Supplier Part Number=954-103AT-2, Tolerance=1%, Category=Thermistors, ComponentLink1Description=https://datasheet.octopart.com:443/103AT-2-Semitec-datasheet-182147832.pdf?src-supplier=IHS, ComponentLink1URL=https://datasheet.octopart.com:443/103AT-2-Semitec-datasheet-182147832.pdf?src-supplier=IHS, ComponentLink2Description=https://datasheet.octopart.com:443/103AT-2-Semitec-datasheet-151884368.pdf?src-supplier=Upverter, ComponentLink2URL=https://datasheet.octopart.com:443/103AT-2-Semitec-datasheet-151884368.pdf?src-supplier=Upverter, Height=4mm, Lead Pitch=2.54mm, Length=17mm, Lifecycle Status=Production, Number of Terminals=2, Packaging=Bulk, Pins=2, Power Rating=10mW, Pricing="1=0.58, 10=0.545, 50=0.485, 100=0.462, 1000=0.4, 10000=0.366 (USD)", RoHS=Compliant, Stock=17162, Supplier=Mouser, Termination=Radial, Width=2.4mm